# Altium PCB 主板-加霍尔.PcbDoc (part 4 of 4)
Units mm, origin at the board's own origin, x right, y up, seen from the top; angles counter-clockwise.
Board outline 97.69 x 103.45 mm, 2 copper layers (Top Layer, Bottom Layer); 80 components, 81 nets, 260 pads, 281 vias.
Unrouted connection lines stored in the file: 12.
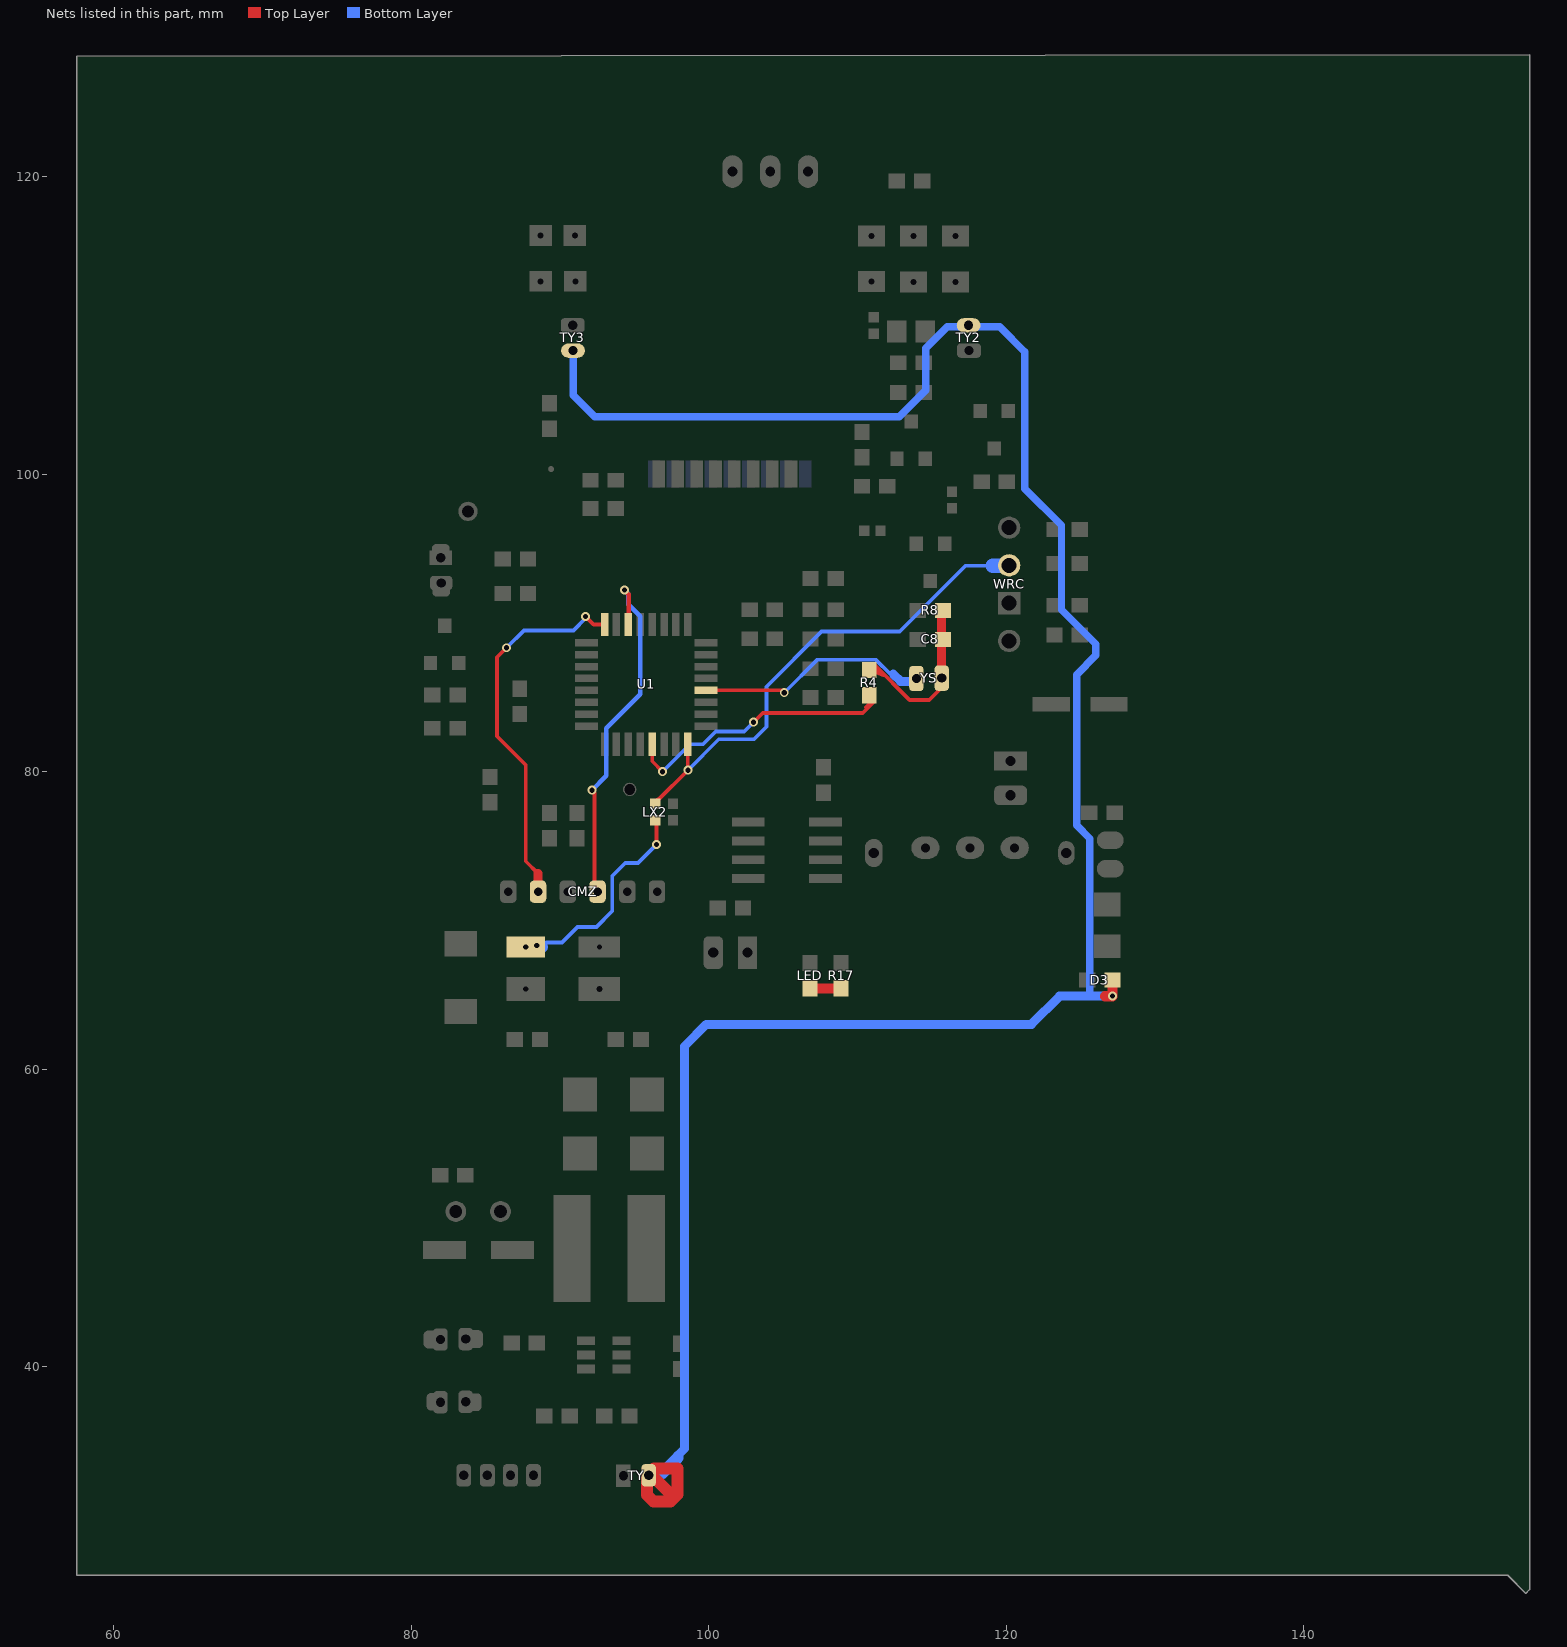
[diagram p4: the nets of this part, all layers, seen from the top]

## Via types
v1: diameter 0.6, hole 0.35, Top Layer to Bottom Layer, 105 vias
v2: diameter 0.7, hole 0.4, Top Layer to Bottom Layer, 104 vias
v3: diameter 0.8, hole 0.5, Top Layer to Bottom Layer, tented both sides, 30 vias
v4: diameter 0.8, hole 0.5, Top Layer to Bottom Layer, 15 vias
v5: diameter 1, hole 0.6, Top Layer to Bottom Layer, tented both sides, 5 vias
v6: diameter 1, hole 0.75, Top Layer to Bottom Layer, tented both sides, 5 vias
v7: diameter 3.4, hole 2.9, Top Layer to Bottom Layer, 4 vias
v8: diameter 0.65, hole 0.4, Top Layer to Bottom Layer, tented both sides, 2 vias
v9: diameter 0.8, hole 0.35, Top Layer to Bottom Layer, 2 vias
v10: diameter 0.7, hole 0.35, Top Layer to Bottom Layer, 2 vias
v11: diameter 1.1, hole 0.68, Top Layer to Bottom Layer, 2 vias
v12: diameter 0.62, hole 0.4, Top Layer to Bottom Layer, 1 vias
v13: diameter 0.95, hole 0.5, Top Layer to Bottom Layer, 1 vias
v14: diameter 0.9, hole 0.5, Top Layer to Bottom Layer, tented both sides, 1 vias
v15: diameter 0.7, hole 0.4, Top Layer to Bottom Layer, tented bottom, 1 vias
v16: diameter 0.8, hole 0.5, Top Layer to Bottom Layer, tented bottom, 1 vias

## Nets (pads, with @x,y where several pads share a name; then routed paths per layer and width w, separated by ;. In a path a pad name is that pad's centre, name@x,y a point inside that pad or via, vN(x,y) a via of type N, cw(c..) or ccw(c..) an arc to the next point about the centre after c; other vN are vias at no path point) (continued)
SWIM: LX2.1 LX2.2 pad.0@87.7,68.222 U1.32 WRC.3 | length 48.3
  Top Layer w0.254: LX2.1@96.3,76.742 96.495,76.547 96.495,75.184 v1@96.456,75.146 ; LX2.2@96.601,78.113 v1(98.6,80.112) U1.32@98.6,81.852
  Top Layer w0.3: LX2.2@96.3,77.842 96.571,78.113 LX2.2@96.601,78.113
  Bottom Layer w0.254: 89.103,68.529 90.145,68.529 91.186,69.571 92.456,69.571 93.523,70.637 93.523,73 94.386,73.863 95.25,73.863 v1(96.495,75.108) ; v1(98.6,80.112) 100.683,82.194 103.048,82.194 103.886,83.033 103.886,85.725 107.594,89.433 112.841,89.433 117.261,93.853 119.126,93.853
  Bottom Layer w0.8: pad.0@87.6,68.182 pad.0@87.968,68.182 ; pad.0@87.986,68.199 88.773,68.199 pad.0@88.809,68.235
  Bottom Layer w1: 119.126,93.853 WRC.3@120.2,93.853
  other v9: 88.443,68.326
SWIM/BT: 
T-LED: LED.1 R17.1 | length 1.7
  Top Layer w0.7: LED.1@106.909,65.583 107.061,65.43 R17.1@108.58,65.43
TEMP: 
TS: 
TY: D3.2 TY2.1 TY3.1 TY.1 | length 158.3
  Top Layer w0.7: 126.644,64.922 v1@127.15,64.922 ; v1(127.15,64.92) D3.2@127.15,66
  Top Layer w0.8: TY.1@96.319,33.172 97.917,33.172 97.917,31.42 97.681,31.183 ; 97.681,31.183 97.444,30.947 96.282,30.947 95.86,31.369 95.86,33.004 97.681,31.183
  Bottom Layer w0.5: TY3.1@90.881,108.419 90.881,105.308 92.329,103.861 112.801,103.861 114.605,105.664 114.605,108.483 116.041,109.919 119.57,109.919 121.26,108.229 121.26,99.035 123.723,96.571 123.723,90.907 126.035,88.595 126.035,87.833 124.739,86.538 124.739,76.403 125.628,75.514 125.628,64.922 ; 125.882,64.922 125.885,64.92 v1(127.15,64.92)
  Bottom Layer w0.6: 97.917,33.884 97.917,34.033 98.374,34.49 98.374,61.544 99.847,63.017 121.691,63.017 123.596,64.922 v1@127.15,64.922
  Bottom Layer w0.8: TY.1@96.064,32.8 96.808,32.8 ; 96.808,32.775 97.917,33.884
Y30: CMZ.6 U1.16 | length 25.6
  Top Layer w0.254: v1(86.411,88.341) 85.776,87.706 85.776,82.398 87.706,80.467 87.706,73.99 88.53,73.166 ; v1(91.719,90.449) 92.266,89.902 U1.16@93,89.902
  Top Layer w0.6: CMZ.6@88.53,71.944 88.53,73.166
  Bottom Layer w0.254: v1(86.411,88.341) 87.579,89.51 90.907,89.51 91.719,90.322 v1(91.719,90.449)
Y30-D: 
Y>: CMZ.4 U1.14 | length 24.7
  Top Layer w0.254: v1(92.151,78.765) 92.329,78.588 92.329,72.145 CMZ.4@92.53,71.944
  Top Layer w0.3: v1(94.336,92.227) 94.615,91.948 94.615,89.917 U1.14@94.6,89.902
  Bottom Layer w0.3: v1(92.151,78.765) 93.116,79.731 93.116,82.92 95.402,85.206 95.402,90.464 94.59,91.277 94.59,91.973 v1(94.336,92.227)
YS: C8.2 R4.1 R8.1 YS.1 | length 11.7
  Top Layer w0.254: R4.1@110.846,87.147 111.201,87.147 113.513,84.836 114.833,84.836 115.664,85.667 YS.1@115.664,86.075 ; 111.328,86.817 111.133,86.736 111.735,86.487
  Top Layer w0.6: YS.1@115.664,86.6 R8.1@115.664,90.881
YS-U: R4.2 U1.29 | length 19.6
  Top Layer w0.254: U1.29@96.2,81.853 96.2,80.711 v1(96.901,80.01) ; v1(103.022,83.337) 103.632,83.947 110.363,83.947 110.753,84.337 ; R4.2@110.8,85.15 110.8,84.574 110.563,84.337 110.753,84.337 ; R4.2@111.1,84.734 R4.2@111.125,84.709 ; R4.2@111.125,84.912 R4.2@111.125,84.709 ; 110.753,84.337 R4.2@111.125,84.709
  Bottom Layer w0.254: v1(96.901,80.01) 98.743,81.852 99.623,81.852 100.472,82.702 102.387,82.702 v1(103.022,83.337)
YS_D: U1.4 YS.2 | length 15.7
  Top Layer w0.254: U1.4@99.825,85.478 104.932,85.471 v1(105.081,85.321)
  Bottom Layer w0.254: v1(105.081,85.321) 107.289,87.528 111.252,87.528 112.206,86.574 112.409,86.574
  Bottom Layer w0.6: 112.409,86.574 112.903,86.081 YS.2@113.995,86.081
ZFKZ: 
pads on no net: U4.6
copper on no net: | length 1.1
  Bottom Layer w0.15: 89.789,64.668 90.881,64.668
  other v7: 82.557,57.679 125.775,60.079 89.13,119.579 119.262,119.579

## Polygon pours and split planes (outlines as drawn)
GND on Top Layer "Top Layer-No Net" (hatched 90Degree grid 0.508 track 0.203, remove dead copper, pour order 4): 131.953,30.32 131.457,30.32 131.246,30.531 130.677,31.1 130.677,31.596 130.677,48.87 136.834,48.87 136.834,51.562 136.428,51.969 136.428,52.197 130.703,52.197 130.677,52.223 130.677,53.747 135.691,53.747 135.945,54.001 137.063,55.118 137.063,55.423 137.063,61.062 136.91,61.214 135.615,62.51 130.763,62.51 130.763,97.244 130.677,97.331 132.127,98.781 133.862,98.781 133.862,98.806 135.386,100.33 135.539,100.178 136.677,100.178 136.677,115.388 136.707,115.418 136.724,115.435 142.502,115.435 142.502,104.339 143.641,103.2 144.378,103.937 163.733,103.937 163.733,104.14 164.291,104.699 164.266,104.724 164.266,113.716 172.877,113.716 172.953,113.792 172.988,113.757 172.988,99.964 174.741,99.964 176.229,98.476 176.28,98.527 177.372,98.527 177.748,98.527 179.177,97.098 179.177,59.517 179.177,58.549 178.541,57.912 178.185,57.557 177.804,57.557 174.959,57.557 174.883,57.48 174.197,58.166 173.766,58.166 173.766,58.776 173.41,59.131 173.41,61.392 172.673,62.129 172.6,62.202 172.208,62.202 151.29,62.202 151.261,62.23 151.185,62.154 150.677,62.154 150.601,62.154 149.915,61.468 149.677,61.23 149.677,60.225 149.677,31.602 149.661,31.586 149.661,30.937 149.61,30.937 149.077,30.404 148.993,30.32 148.403,30.32 131.953,30.32
GND on Bottom Layer "Top Layer-No Net" (solid, remove dead copper, pour order 3): 26.981,30.771 26.485,30.771 26.274,30.982 25.705,31.551 25.705,32.047 25.705,49.321 31.862,49.321 31.862,52.013 31.456,52.42 31.456,52.648 25.731,52.648 25.705,52.674 25.705,54.198 30.719,54.198 30.973,54.452 32.091,55.569 32.091,55.874 32.091,61.513 31.938,61.665 30.643,62.961 25.792,62.961 25.792,97.696 25.705,97.782 27.156,99.232 28.89,99.232 28.89,99.257 30.414,100.781 30.567,100.629 31.705,100.629 31.705,115.839 31.735,115.869 31.752,115.886 37.531,115.886 37.531,104.791 38.669,103.652 39.406,104.388 58.761,104.388 58.761,104.591 59.32,105.15 59.294,105.176 59.294,114.167 67.905,114.167 67.981,114.243 68.017,114.208 68.017,100.415 69.769,100.415 71.258,98.927 71.308,98.978 72.401,98.978 72.776,98.978 74.206,97.549 74.206,59.968 74.206,59 73.569,58.363 73.213,58.008 72.832,58.008 69.988,58.008 69.911,57.932 69.226,58.617 68.794,58.617 68.794,59.227 68.438,59.583 68.438,61.843 67.702,62.58 67.629,62.653 67.236,62.653 46.318,62.653 46.289,62.681 46.213,62.605 45.705,62.605 45.629,62.605 44.943,61.919 44.705,61.682 44.705,60.676 44.705,32.053 44.689,32.037 44.689,31.389 44.638,31.389 44.105,30.855 44.021,30.771 43.431,30.771 26.981,30.771

## Keep-outs
Keep-Out Layer:
  circle w0.1: c82.557,57.679 r1.45
  circle w0.1: c119.262,119.579 r1.45
  circle w0.1: c89.13,119.579 r1.45
  lines w0.1: 80,58.793 80,78.216 cw(c80.562,78.216) 80.562,78.778 ; 80,59.154 80,31.494 ccw(c81.276,31.494) 81.276,30.218 97.726,30.218 ccw(c97.718,31.5) 99,31.5 99,60.123 cw(c100.977,60.123) 100.977,62.1 121.53,62.1 cw(c121.53,60.884) 122.746,60.884 122.746,59.436 ccw(c124.8,59.436) 124.8,57.382 ; 80,81.955 80,97.229 85.95,99.929 86,99.979 86,119.634 cw(c88.245,119.634) 88.245,121.879 ; 80.01,81.955 ccw(c80.626,81.955) 80.626,81.339 ; 80.562,78.779 83,78.779 ; 80.626,81.339 83,81.339 ; 83,78.809 83,81.309 ; 86,66.2 94.4,66.2 ; 86,66.232 86,67.462 ; 86,67.502 94.4,67.502 ; 88.195,121.879 90.922,121.879 92.431,120.371 99.187,120.371 100.695,121.879 107.458,121.879 108.737,120.599 111.76,120.599 113.04,121.879 120.141,121.879 ; 94.4,66.232 94.4,67.462 ; 119.941,121.879 cw(c119.941,119.57) 122.25,119.57 122.25,100.029 122.311,99.862 128.5,96.996 128.5,81.869 ; 124.8,57.382 126.467,57.382 ccw(c126.467,59.415) 128.5,59.415 128.5,78.096 ; 125.48,78.809 125.48,81.309 ; 125.495,78.779 127.787,78.779 ; 125.495,81.339 127.94,81.339 ccw(c127.94,81.899) 128.5,81.899 ; 127.787,78.779 cw(c127.787,78.066) 128.5,78.066 ; 87.757,113.673 87.757,115.333 91.825,115.333 91.825,113.673 87.757,113.673 ; 93.218,106.274 94.005,105.486 107.442,105.486 108.356,106.401 108.356,117.043 107.239,118.161 94.082,118.161 93.218,117.297 93.218,106.274 ; 109.728,113.673 109.728,115.333 118.085,115.333 118.085,113.673 109.728,113.673
  lines w0.15: 89.789,64.668 89.789,65.801

## Other copper
Top Layer:
  rectangle net NetC4_1: 98.4,67.054 100.046,70.714
  rectangle net NetC4_1: 99.314,65.049 100.635,69.139
  rectangle net NetC4_1: 100.178,65.634 101.194,76.835
  rectangle net NetC4_2: 103.581,65.405 105.029,69.825
  rectangle net NetC4_2: 102.189,65.583 103.759,74.143
  rectangle net 8.4V: 120.32,68.859 122.346,75.566
  rectangle net 8.4V: 120.345,73.406 122.174,75.514
  rectangle net BT: 121.488,76.759 122.453,78.867
  rectangle net BT: 115.087,65.938 118.059,73.203
  rectangle net BT: 113.817,72.542 117.983,77.14
  rectangle net GND: 106.248,80.493 118.415,82.525
  rectangle net GND: 118.262,80.01 124.003,82.88
  rectangle net BT: 106.985,76.759 121.641,78.765
  rectangle net NetC4_1: 100.635,75.082 103.149,76.632
  rectangle net BT: 114.122,63.83 116.967,66.116
  rectangle net GND: 86.563,36.373 88.951,38.622
  rectangle net GND: 87.249,38.658 89.75,40.615
  rectangle net GND: 101.6,77.902 105.125,81.686
  rectangle net 5V: 89.764,42.367 91.008,45.009
  region net GND: 94.844,32.207 94.844,35.027 91.161,35.027 91.161,32.207
  rectangle net TY: 95.961,31.191 97.917,33.198
  rectangle net GND: 91.161,31.42 93.37,33.985
Bottom Layer:
  rectangle net GND: 88.494,31.318 91.567,34.417
  rectangle net NetC4_1: 99.136,66.116 100.584,67.513
  rectangle net GND: 108.001,70.256 112.37,71.399
  rectangle net GND: 110.236,70.841 112.42,72.111
  rectangle net GND: 100.381,79.781 101.638,80.645
  rectangle net GND: 99.924,78.359 101.676,80.112
  rectangle net GND: 101.346,78.562 105.207,81.61
  rectangle net GND: 109.118,64.338 112.624,66.116
  rectangle net BT: 114.757,68.402 117.526,70.688
  rectangle net GND: 85.95,43.917 88.138,47.295
  rectangle net NetC4_1: 98.273,67.513 98.781,68.428
  rectangle net NetC4_1: 98.654,66.98 100.99,68.834
  rectangle net NetC4_1: 100.279,66.167 100.94,70.51
  rectangle net NetC4_2: 102.159,68.123 103.683,71.399
  rectangle net NetC4_2: 102.21,65.862 105.131,69.393
  rectangle net GND: 86.462,39.243 89.421,40.945
  rectangle net BT: 115.087,68.758 117.907,72.822
  rectangle net 8.4V: 119.583,68.682 122.301,74.447
  rectangle net BT: 114.833,73.914 117.704,77.572
  rectangle net GND: 104.572,79.223 106.172,81.432
  rectangle net GND: 105.639,80.315 121.488,82.499
  rectangle net BT: 106.832,77.013 121.742,78.842
  rectangle net GND: 106.07,100.432 107.798,102.464
  rectangle net GND: 86.106,63.373 88.951,64.643
  rectangle net GND: 89.023,37.059 91.08,40.437
  rectangle net GND: 87.173,36.322 94.59,43.104
  rectangle net GND: 88.036,41.91 92.481,62.992
  rectangle net GND: 94.234,42.164 95.25,52.502
  rectangle net GND: 87.732,35.56 95.733,62.763

## Silkscreen, mask and mechanical layers (free items; w line width, h text height)
Top Overlay:
  circle w0.16: c125.175,84.532 r2.5
  circle w0.18: c84.556,47.93 r3.15
  lines w0.16: 109.601,95.479 109.601,96.926 112.319,96.926 112.319,95.479 109.601,95.479 ; 110.338,108.737 110.338,111.277 111.836,111.277 111.836,108.737 110.338,108.737 ; 115.621,96.901 117.069,96.901 117.069,99.543 115.621,99.543 115.621,96.901
  lines w0.2: 94.894,102.006 94.894,105.08 ; 94.894,118.389 94.894,120.142 ; 107.29,101.776 107.29,105.029
  lines w0.22: 92.964,30.48 96.749,30.48 ; 117.096,63.629 120.5,63.629 ; 117.125,63.598 117.125,68.729 ; 117.125,68.727 111.121,68.727 111.121,76.116 123.999,76.116 ; 120.5,63.598 120.5,68.729 ; 120.525,68.729 123.973,68.727 123.973,76.116 ; 122.475,81.748 127.825,81.748 ; 122.475,81.823 122.475,85.95 123.778,87.253 ; 123.825,87.273 127.85,87.273 127.85,81.773 ; 127.85,81.779 127.875,81.804 ; 81.198,46.488 81.198,51.219 87.924,51.219 87.917,44.619 83.067,44.619 81.198,46.488
  text "G-" at 97.739,118.745 h1.3
  text "-R" at 108.331,118.72 h1.3
  text "BC2" at 92.939,116.611 h0.85 r90
  text "GND" at 87.325,116.103 h0.85 r90
  text "GND" at 119.482,113.335 h1 r90
  text "HWPOW" at 109.601,112.37 h0.9 r90
  text "BC1" at 87.376,111.938 h0.9 r90
  text "M1" at 100.406,102.845 h1.6
  text "GND" at 84.861,97.155 h0.9
  text "CE" at 99.67,96.698 h0.9 r90
  text "IRQ" at 106.045,95.936 h0.9 r90
  text "3V3" at 97.028,95.809 h0.9 r90
  text "GND" at 98.374,95.809 h0.9 r90
  text "SCK" at 102.184,95.733 h0.9 r90
  text "CSN" at 100.889,95.656 h0.9 r90
  text "MOSI" at 103.429,95.148 h0.9 r90
  text "MISO" at 104.699,95.047 h0.9 r90
  text "16" at 92.227,90.424 h0.7 r90
  text "RST" at 119.151,86.309 h0.8
  text "+" at 120.066,83.642 h1.8
  text "1" at 100.609,81.661 h0.8
  text "+" at 122.885,77.318 h2.5
  text "+" at 117.323,77.14 h2.5
  text "+" at 112.395,76.886 h2.5
  text "Y>" at 92.989,73.584 h1 r90
  text "GN" at 97.028,73.508 h1 r90
  text "3.3V" at 86.919,73.482 h1 r90
  text "AM" at 90.881,73.482 h1 r90
  text "Y30" at 88.951,73.457 h1 r90
  text "<Z" at 94.971,73.431 h1 r90
  text "NTC" at 125.603,73.177 h0.8 r90
  text "-" at 125.806,71.145 h2.3
  text "8.4V" at 121.818,69.672 h1 r90
  text "SWIM" at 86.309,69.367 h0.8
  text "RST" at 91.796,69.291 h0.8
  text "BAT" at 116.281,65.354 h1 r90
  text "+" at 96.19,64.999 h2
  text "5V" at 89.332,63.576 h1
  text "+" at 92.024,62.433 h2
  text "-" at 86.665,62.306 h2.2
  text "+" at 80,44.628 h2
  text "+" at 97.257,34.696 h1.5 r90
Bottom Overlay:
  circle w0.2: c84.497,49.733 r2.6
  lines w0.16: 95.021,101.776 95.021,105.181 ; 96.19,95.123 96.19,93.32 96.596,92.913 104.75,92.913 105.105,93.269 105.105,95.199 ; 97.46,95.199 97.46,93.751 97.485,93.726 106.553,93.726 106.655,93.828 106.655,95.275 ; 98.6,70.028 98.6,63.119 104.369,63.119 104.369,69.875 104.521,70.028 98.628,70.028 ; 106.756,101.879 106.756,105.054
  lines w0.25: 96.063,101.956 96.063,105.029 ; 108.001,101.802 108.001,105.054
  lines w0.254: 90.932,117.069 92.024,118.161 ; 91.592,110.846 92.685,111.938 ; 91.618,111.938 92.71,110.846
  text "-G" at 99.898,118.643 h1.2
  text "38BC2" at 95.021,118.593 h0.8
  text "R-" at 110.211,118.567 h1.2
  text "38OUT" at 87.401,118.186 h0.8 r90
  text "HWPOW" at 109.576,116.713 h0.9 r90
  text "GND" at 119.964,116.408 h1.2 r90
  text "38BC1" at 87.452,113.309 h0.8 r90
  text "FL" at 114.427,110.414 h1.2
  text "SCK" at 101.778,98.146 h0.9 r90
  text "GND" at 107.213,98.12 h0.9 r90
  text "IRQ" at 97.917,98.095 h0.9 r90
  text "3V3" at 105.664,98.095 h0.9 r90
  text "MISO" at 99.212,98.069 h0.9 r90
  text "CE" at 104.343,98.069 h0.9 r90
  text "GND" at 85.115,98.044 h1 r180
  text "CSN" at 103.048,98.044 h0.9 r90
  text "GND" at 96.698,98.019 h0.9 r90
  text "MOSI" at 100.482,97.993 h0.9 r90
  text "3.3" at 118.796,95.936 h1
  text "SWIM" at 118.847,93.32 h1
  text "GND" at 118.593,90.932 h1
  text "RST" at 118.415,88.265 h1
  text "YS" at 112.192,85.395 h1.5
  text "BT" at 120.98,84.404 h1.5 r90
  text "+" at 123.469,77.394 h2
  text "AM" at 90.043,73.66 h1 r270
  text "8.4V" at 121.818,73.482 h1 r90
  text "GND" at 96.012,73.457 h1 r270
  text "3.3V" at 86.106,73.431 h1 r270
  text "Y>" at 91.948,73.431 h1 r270
  text "<Z" at 93.949,73.431 h1 r270
  text "Y30" at 87.96,73.406 h1 r270
  text "BT" at 117.018,71.984 h1.4
  text "GND" at 86.004,64.11 h1.15 r180
  text "MO" at 102.616,63.602 h1.5
  text "+" at 93.37,62.255 h2.2
  text "DC 5V" at 93.091,60.681 h1.2
  text "2000MA" at 93.701,58.699 h1.2
  text "C1" at 87.028,52.615 h1.2
  text "+" at 81.509,49.53 h1.8
  text "201901001CCHF" at 90.475,43.028 h1 r270
  text "BH1" at 88.367,40.996 h1.2
  text "BH2" at 88.646,36.754 h1.2
  text "BC2" at 92.151,34.468 h1.2 r90
  text "BC1" at 81.864,34.265 h1.2 r90
  text "TY" at 98.349,33.731 h1.2 r90
Top Solder:
  lines w0.7: 103.048,76.683 101.041,76.683 ; 101.041,76.683 100.373,76.683 99.72,76.03 99.72,73.152 100.355,73.787 100.355,75.997 101.041,76.683
  lines w1: 102.26,75.616 102.26,76.505 ; 102.286,72.949 102.286,73.889
Bottom Solder:
  rectangle: 87.224,34.747 95.529,62.001